# Altium PCB PCB.PcbDoc (part 2 of 2)
Units mil, origin at the board's own origin, x right, y up, seen from the top; angles counter-clockwise.
Board outline 3950.03 x 3160.03 mil, 2 copper layers (Top Layer, Bottom Layer); 198 components, 30 nets, 510 pads, 84 vias.
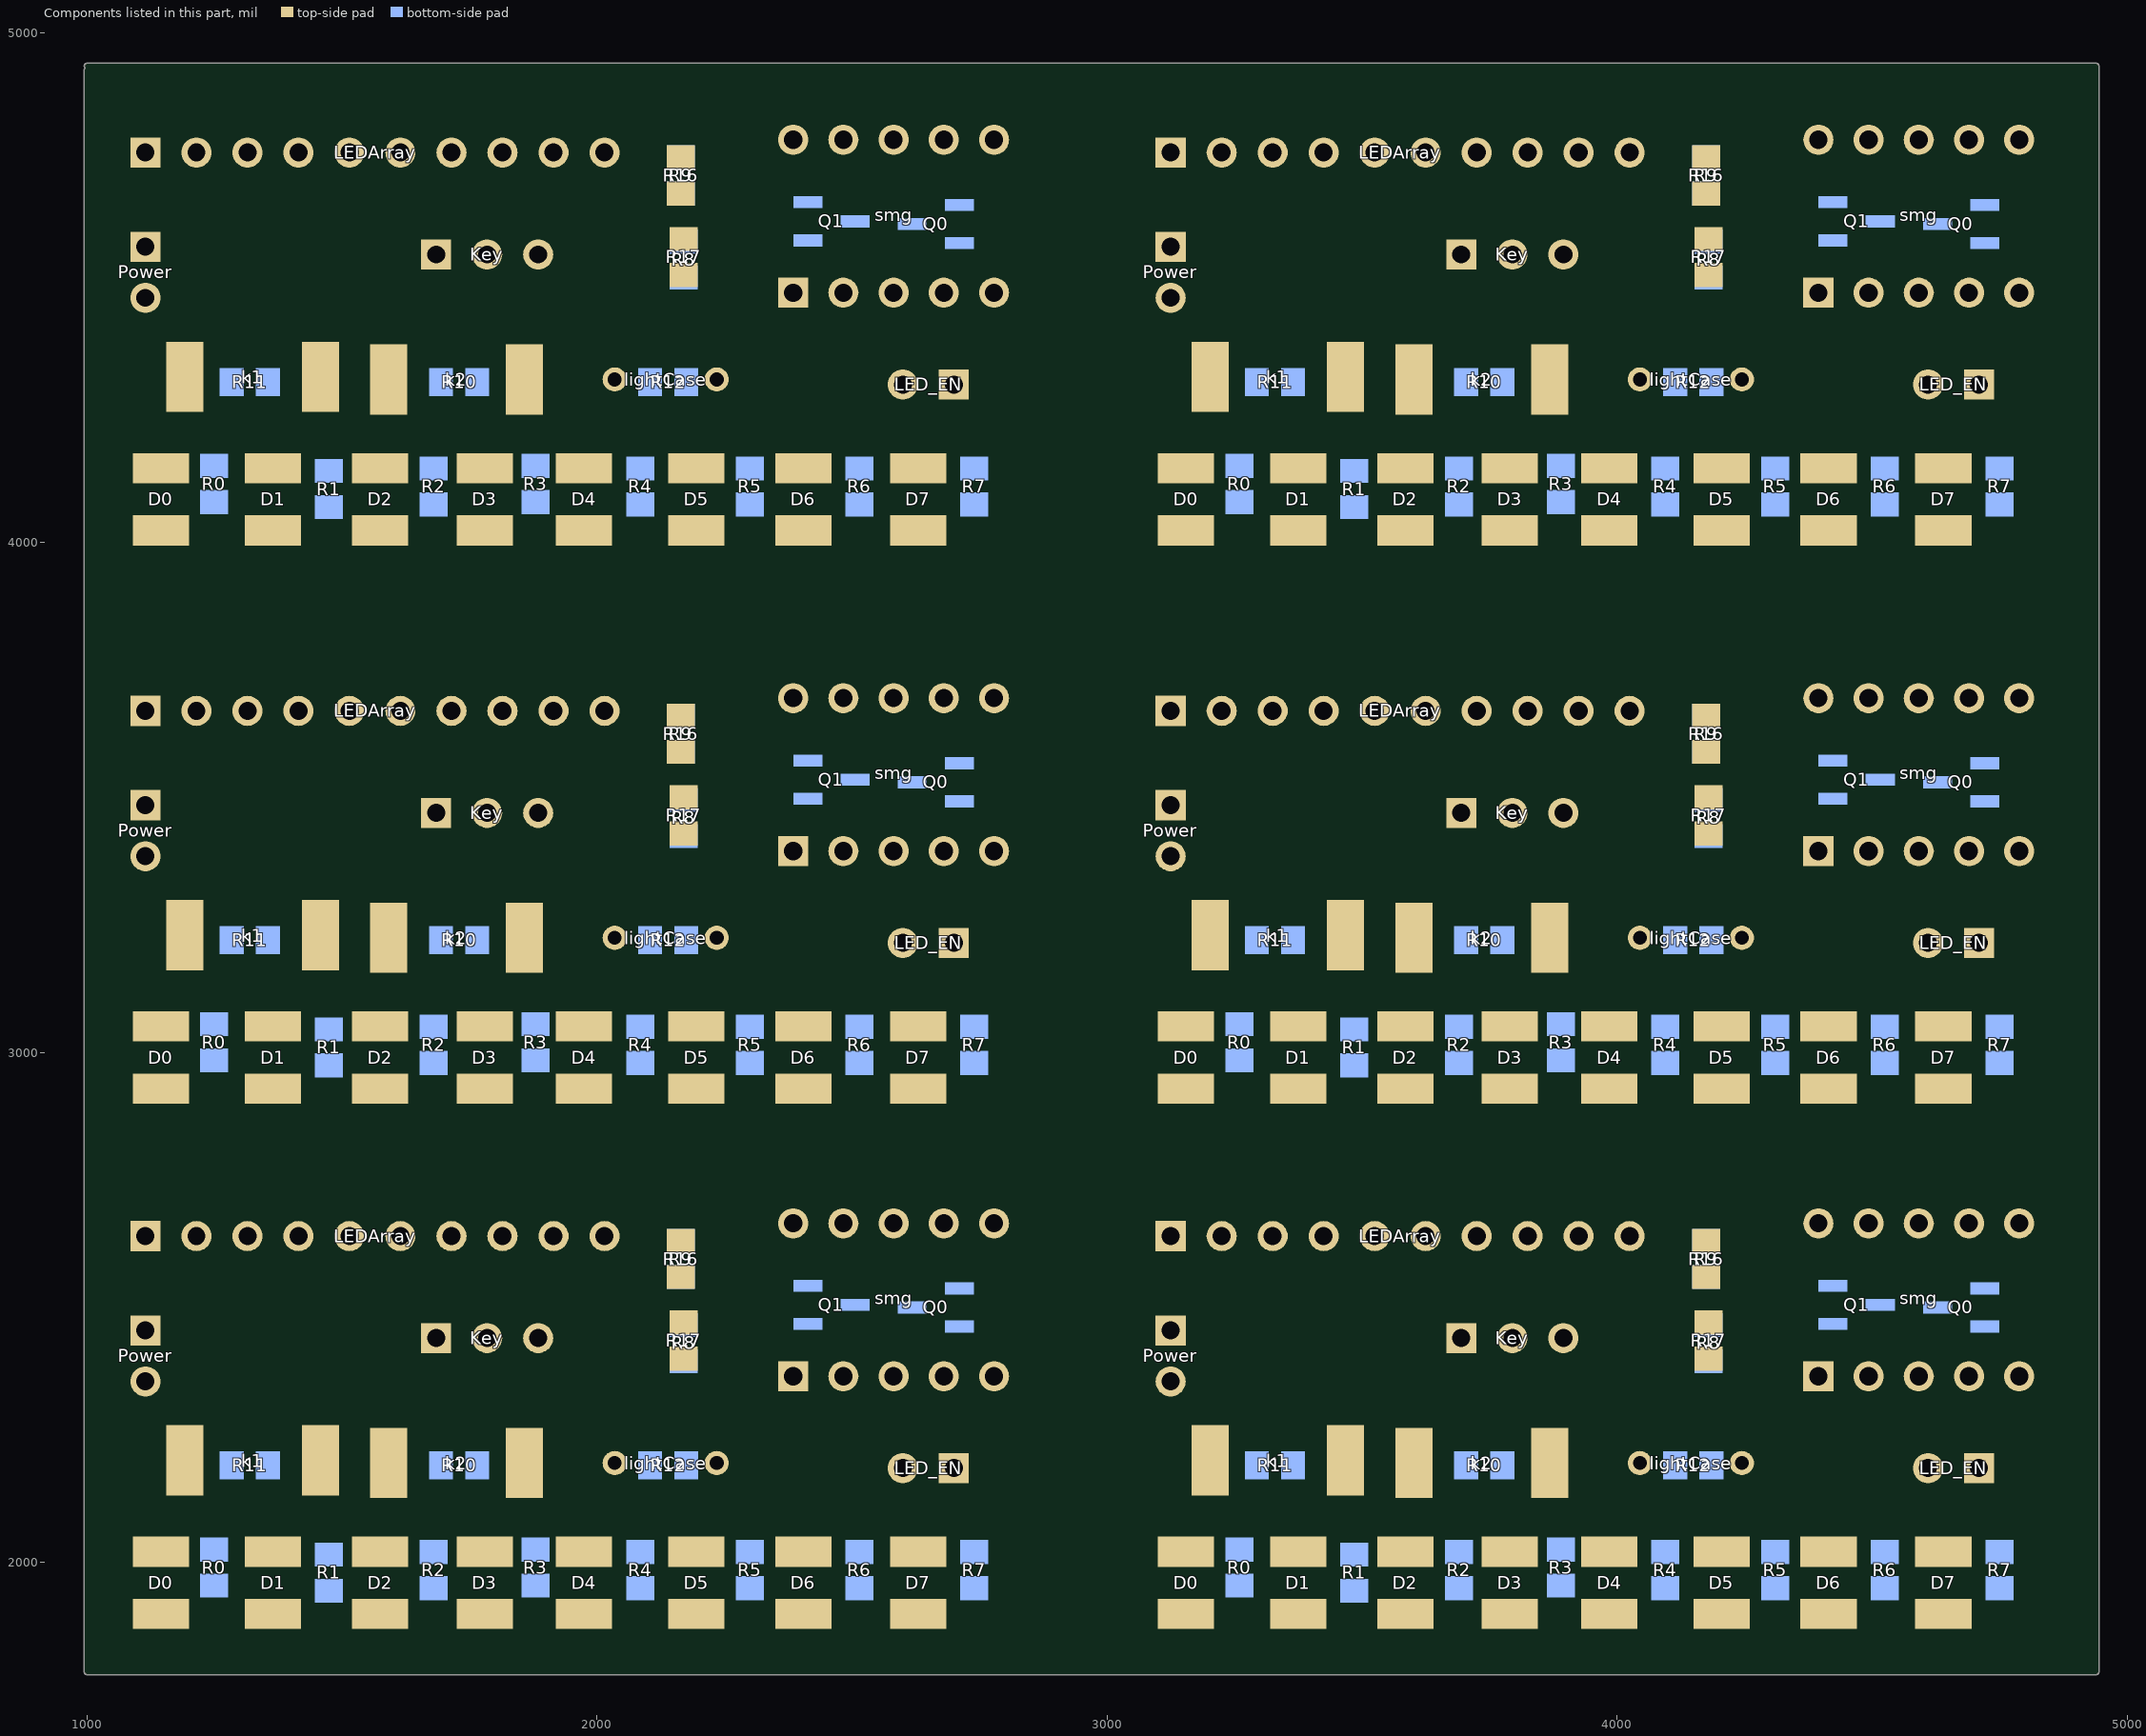
[diagram p2: the components of this part, seen from the top]

## Via types
v1: diameter 50, hole 28, Top Layer to Bottom Layer, 84 vias

## Nets (pads, with @x,y where several pads share a name; then routed paths per layer and width w, separated by ;. In a path a pad name is that pad's centre, name@x,y a point inside that pad or via, vN(x,y) a via of type N, cw(c..) or ccw(c..) an arc to the next point about the centre after c; other vN are vias at no path point) (continued)
copper on no net: | length 167112.4
  Top Layer w10: v1(1070,2242) 1070,2495 1215,2640 ; v1(1070,3272) 1070,3525 1215,3670 ; 1115,2355 1192.13,2277.87 1192.13,2200 1192.13,2125 1202.13,2115 1582.13,2115 1592.13,2125 1592.13,2195 ; 1115,3385 1192.13,3307.87 1192.13,3230 1192.13,3155 1202.13,3145 1582.13,3145 1592.13,3155 1592.13,3225 ; 1145,1898.98 1365,1898.98 1575,1898.98 1780,1898.98 1975,1898.98 2195,1898.98 2405,1898.98 2630,1898.98 2701,1969.98 2701,2066 2700,2067 2700,2185 ; 1145,2928.98 1365,2928.98 1575,2928.98 1780,2928.98 1975,2928.98 2195,2928.98 2405,2928.98 2630,2928.98 2701,2999.98 2701,3096 2700,3097 2700,3215 ; 1415,2640 1505,2730 2383,2730 2438,2675 2438,2410.43 2483.43,2365 ; 1415,3670 1505,3760 2383,3760 2438,3705 2438,3440.43 2483.43,3395 ; 1457.87,2200 1457.87,2275 1497.87,2315 1608,2315 1685,2392 1685,2440 ; 1457.87,3230 1457.87,3305 1497.87,3345 1608,3345 1685,3422 1685,3470 ; 1785,2440 1857.87,2367.13 1857.87,2195 ; 1785,3470 1857.87,3397.13 1857.87,3225 ; 1815,2640 1815,2582.09 2127.09,2270 2683.7,2270 2778.7,2365 ; 1815,3670 1815,3612.09 2127.09,3300 2683.7,3300 2778.7,3395 ; 1885,2440 2130,2195 2235,2195 ; 1885,3470 2130,3225 2235,3225 ; 1915,2640 1995,2560 2097.2,2560 2097.63,2559.57 2165,2559.57 ; 1915,3670 1995,3590 2097.2,3590 2097.63,3589.57 2165,3589.57 ; v1(2013,2520) 2032,2539 2044,2539 v1(2107,2476) ; v1(2013,3550) 2032,3569 2044,3569 v1(2107,3506) ; 2015,2640 2065,2690 2200,2690 2240,2650 2240,2470.43 2170,2470.43 ; 2015,3670 2065,3720 2200,3720 2240,3680 2240,3500.43 2170,3500.43 ; 2035,2195 2078,2152 2567,2152 2600,2185 ; 2035,3225 2078,3182 2567,3182 2600,3215 ; 2165,2630.43 2093.43,2630.43 2053.53,2590.53 1995.47,2590.53 1960,2626 1960,2664.53 1940,2684.53 1880,2684.53 1870,2674.53 1870,2592.75 2142.27,2320.47 2520,2320.47 2533,2333.47 2533,2475 2573,2515 v1(2779,2515) ; 2165,3660.43 2093.43,3660.43 2053.53,3620.53 1995.47,3620.53 1960,3656 1960,3694.53 1940,3714.53 1880,3714.53 1870,3704.53 1870,3622.75 2142.27,3350.47 2520,3350.47 2533,3363.47 2533,3505 2573,3545 v1(2779,3545) ; 2170,2399.57 2234.97,2399.57 2280,2444.6 v1(2280,2450) ; 2170,3429.57 2234.97,3429.57 2280,3474.6 v1(2280,3480) ; v1(2280,2091) 1826,2091 1730,2187 1730,2525 1615,2640 1665,2690 1835.94,2690 1855.94,2710 2340,2710 2385,2665 ; v1(2280,3121) 1826,3121 1730,3217 1730,3555 1615,3670 1665,3720 1835.94,3720 1855.94,3740 2340,3740 2385,3695 ; v1(3080,2242) 3080,2495 3225,2640 ; v1(3080,3272) 3080,3525 3225,3670 ; v1(3080,4367) 3080,4620 3225,4765 ; 3125,2355 3202.13,2277.87 3202.13,2200 3202.13,2125 3212.13,2115 3592.13,2115 3602.13,2125 3602.13,2195 ; 3125,3385 3202.13,3307.87 3202.13,3230 3202.13,3155 3212.13,3145 3592.13,3145 3602.13,3155 3602.13,3225 ; 3125,4480 3202.13,4402.87 3202.13,4325 3202.13,4250 3212.13,4240 3592.13,4240 3602.13,4250 3602.13,4320 ; 3155,1898.98 3375,1898.98 3585,1898.98 3790,1898.98 3985,1898.98 4205,1898.98 4415,1898.98 4640,1898.98 4711,1969.98 4711,2066 4710,2067 4710,2185 ; 3155,2928.98 3375,2928.98 3585,2928.98 3790,2928.98 3985,2928.98 4205,2928.98 4415,2928.98 4640,2928.98 4711,2999.98 4711,3096 4710,3097 4710,3215 ; 3155,4023.98 3375,4023.98 3585,4023.98 3790,4023.98 3985,4023.98 4205,4023.98 4415,4023.98 4640,4023.98 4711,4094.98 4711,4191 4710,4192 4710,4310 ; 3425,2640 3515,2730 4393,2730 4448,2675 4448,2410.43 4493.43,2365 ; 3425,3670 3515,3760 4393,3760 4448,3705 4448,3440.43 4493.43,3395 ; 3425,4765 3515,4855 4393,4855 4448,4800 4448,4535.43 4493.43,4490 ; 3467.87,2200 3467.87,2275 3507.87,2315 3618,2315 3695,2392 3695,2440 ; 3467.87,3230 3467.87,3305 3507.87,3345 3618,3345 3695,3422 3695,3470 ; 3467.87,4325 3467.87,4400 3507.87,4440 3618,4440 3695,4517 3695,4565 ; 3795,2440 3867.87,2367.13 3867.87,2195 ; 3795,3470 3867.87,3397.13 3867.87,3225 ; 3795,4565 3867.87,4492.13 3867.87,4320 ; 3825,2640 3825,2582.09 4137.09,2270 4693.7,2270 4788.7,2365 ; 3825,3670 3825,3612.09 4137.09,3300 4693.7,3300 4788.7,3395 ; 3825,4765 3825,4707.09 4137.09,4395 4693.7,4395 4788.7,4490 ; 3895,2440 4140,2195 4245,2195 ; 3895,3470 4140,3225 4245,3225 ; 3895,4565 4140,4320 4245,4320 ; 3925,2640 4005,2560 4107.2,2560 4107.63,2559.57 4175,2559.57 ; 3925,3670 4005,3590 4107.2,3590 4107.63,3589.57 4175,3589.57 ; 3925,4765 4005,4685 4107.2,4685 4107.63,4684.57 4175,4684.57 ; v1(4023,2520) 4042,2539 4054,2539 v1(4117,2476) ; v1(4023,3550) 4042,3569 4054,3569 v1(4117,3506) ; v1(4023,4645) 4042,4664 4054,4664 v1(4117,4601) ; 4025,2640 4075,2690 4210,2690 4250,2650 4250,2470.43 4180,2470.43 ; 4025,3670 4075,3720 4210,3720 4250,3680 4250,3500.43 4180,3500.43 ; 4025,4765 4075,4815 4210,4815 4250,4775 4250,4595.43 4180,4595.43 ; 4045,2195 4088,2152 4577,2152 4610,2185 ; 4045,3225 4088,3182 4577,3182 4610,3215 ; 4045,4320 4088,4277 4577,4277 4610,4310 ; 4175,2630.43 4103.43,2630.43 4063.53,2590.53 4005.47,2590.53 3970,2626 3970,2664.53 3950,2684.53 3890,2684.53 3880,2674.53 3880,2592.75 4152.27,2320.47 4530,2320.47 4543,2333.47 4543,2475 4583,2515 v1(4789,2515) ; 4175,3660.43 4103.43,3660.43 4063.53,3620.53 4005.47,3620.53 3970,3656 3970,3694.53 3950,3714.53 3890,3714.53 3880,3704.53 3880,3622.75 4152.27,3350.47 4530,3350.47 4543,3363.47 4543,3505 4583,3545 v1(4789,3545) ; 4175,4755.43 4103.43,4755.43 4063.53,4715.53 4005.47,4715.53 3970,4751 3970,4789.53 3950,4809.53 3890,4809.53 3880,4799.53 3880,4717.75 4152.27,4445.47 4530,4445.47 4543,4458.47 4543,4600 4583,4640 v1(4789,4640) ; 4180,2399.57 4244.97,2399.57 4290,2444.6 v1(4290,2450) ; 4180,3429.57 4244.97,3429.57 4290,3474.6 v1(4290,3480) ; 4180,4524.57 4244.97,4524.57 4290,4569.6 v1(4290,4575) ; v1(4290,2091) 3836,2091 3740,2187 3740,2525 3625,2640 3675,2690 3845.94,2690 3865.94,2710 4350,2710 4395,2665 ; v1(4290,3121) 3836,3121 3740,3217 3740,3555 3625,3670 3675,3720 3845.94,3720 3865.94,3740 4350,3740 4395,3695 ; v1(4290,4216) 3836,4216 3740,4312 3740,4650 3625,4765 3675,4815 3845.94,4815 3865.94,4835 4350,4835 4395,4790
  Bottom Layer w10: v1(1070,2242) 1070,2007 1162,1915 1283,1915 1293,1925 1293,2029.02 1325,2061.02 1394.98,2061.02 1440.57,2015.43 1475,2015.43 ; v1(1070,3272) 1070,3037 1162,2945 1283,2945 1293,2955 1293,3059.02 1325,3091.02 1394.98,3091.02 1440.57,3045.43 1475,3045.43 ; 1115,2355 1170,2300 1170,2188 1276.98,2081.02 2087.93,2081.02 2104.57,2097.67 2104.57,2190 ; 1115,2455 1284.13,2285.87 1284.13,2233 ; 1115,3385 1170,3330 1170,3218 1276.98,3111.02 2087.93,3111.02 2104.57,3127.67 2104.57,3220 ; 1115,3485 1284.13,3315.87 1284.13,3263 ; v1(1145,2021.02) 1211.46,1954.57 1250,1954.57 ; v1(1145,3051.02) 1211.46,2984.57 1250,2984.57 ; 1215,2640 1304.53,2729.53 2517.32,2729.53 2581.85,2665 ; 1215,3670 1304.53,3759.53 2517.32,3759.53 2581.85,3695 ; 1250,2025.43 1250,2062 1136,2176 1136,2262 1041,2357 1041,2566 1115,2640 1224.53,2749.53 2595.75,2749.53 2680.28,2665 ; 1250,3055.43 1250,3092 1136,3206 1136,3292 1041,3387 1041,3596 1115,3670 1224.53,3779.53 2595.75,3779.53 2680.28,3695 ; 1284.13,2190 1284.13,2233 ; 1284.13,3220 1284.13,3263 ; 1315,2640 1359.53,2684.53 1540,2684.53 1560,2664.53 1560,2626 1666,2520 1942,2520 1952.72,2509.28 1952.72,2413.57 2065.21,2301.09 2258.12,2301.09 2330,2372.97 2330,2400 2339.53,2409.53 2537.32,2409.53 2581.85,2365 2581.85,2315.92 2354,2088.07 2354,1915 2309,1870 1870.43,1870 1720,2020.43 1680,2020.43 ; 1315,3670 1359.53,3714.53 1540,3714.53 1560,3694.53 1560,3656 1666,3550 1942,3550 1952.72,3539.28 1952.72,3443.57 2065.21,3331.09 2258.12,3331.09 2330,3402.97 2330,3430 2339.53,3439.53 2537.32,3439.53 2581.85,3395 2581.85,3345.92 2354,3118.07 2354,2945 2309,2900 1870.43,2900 1720,3050.43 1680,3050.43 ; 1355,2190 1355,2162 1340,2147 1245,2147 1245,2295 1140,2400 1080,2400 1070,2410 1070,2515 1100,2545 1580,2545 1685,2440 ; 1355,3220 1355,3192 1340,3177 1245,3177 1245,3325 1140,3430 1080,3430 1070,3440 1070,3545 1100,3575 1580,3575 1685,3470 ; v1(1365,2021.02) 1441.46,1944.57 1475,1944.57 ; v1(1365,3051.02) 1441.46,2974.57 1475,2974.57 ; 1515,2640 1656,2499 1920,2499 1932.72,2486.28 1932.72,2403.98 2055.61,2281.09 2301.09,2281.09 2385,2365 2385,2267.24 2273.76,2156 2216.5,2156 2114.5,2054 2085,2054 2085,2020.43 ; 1515,3670 1656,3529 1920,3529 1932.72,3516.28 1932.72,3433.98 2055.61,3311.09 2301.09,3311.09 2385,3395 2385,3297.24 2273.76,3186 2216.5,3186 2114.5,3084 2085,3084 2085,3050.43 ; v1(1575,2021.02) 1646.46,1949.57 1680,1949.57 ; v1(1575,3051.02) 1646.46,2979.57 1680,2979.57 ; 1715,2640 1811.88,2543.12 1959.88,2543.12 1972.72,2530.28 1972.72,2437.19 2087.15,2322.77 2240.54,2322.77 2310,2392.22 2310,2419.06 2320.47,2429.53 2444.53,2429.53 2460,2445 2460,2522 2470,2532 2650,2532 2665,2517 2665,2440.28 2680.28,2425 2680.28,2365 2655,2339.72 2655,2175 2530,2050 2515,2020.43 ; 1715,3670 1811.88,3573.12 1959.88,3573.12 1972.72,3560.28 1972.72,3467.19 2087.15,3352.77 2240.54,3352.77 2310,3422.22 2310,3449.06 2320.47,3459.53 2444.53,3459.53 2460,3475 2460,3552 2470,3562 2650,3562 2665,3547 2665,3470.28 2680.28,3455 2680.28,3395 2655,3369.72 2655,3205 2530,3080 2515,3050.43 ; 1765.43,2190 1765.43,2305 1785,2324.57 1785,2440 ; 1765.43,3220 1765.43,3335 1785,3354.57 1785,3470 ; v1(1780,2021.02) 1846.46,1954.57 1880,1954.57 ; v1(1780,3051.02) 1846.46,2984.57 1880,2984.57 ; 1880,2025.43 1908.57,2025.43 2024,1910 2130,1910 2155,1935 2155,2046 2240,2131 2356,2131 2483.43,2258.43 2483.43,2365 ; 1880,3055.43 1908.57,3055.43 2024,2940 2130,2940 2155,2965 2155,3076 2240,3161 2356,3161 2483.43,3288.43 2483.43,3395 ; v1(1975,2021.02) 2046.46,1949.57 2085,1949.57 ; v1(1975,3051.02) 2046.46,2979.57 2085,2979.57 ; v1(2013,2520) 1970,2563 1970,2675 2004.53,2709.53 2470,2709.53 2483.43,2696.1 2483.43,2665 ; v1(2013,3550) 1970,3593 1970,3705 2004.53,3739.53 2470,3739.53 2483.43,3726.1 2483.43,3695 ; 2035,2195 1949,2109 1740.57,2109 1694.57,2155 1694.57,2190 1437,2190 1394,2233 1284.13,2233 ; 2035,3225 1949,3139 1740.57,3139 1694.57,3185 1694.57,3220 1437,3220 1394,3263 1284.13,3263 ; v1(2107,2476) 2170,2476 2170,2465.43 ; v1(2107,3506) 2170,3506 2170,3495.43 ; 2165,2559.57 2320.55,2559.57 2360.2,2599.21 2712.91,2599.21 2778.7,2665 ; 2165,2630.43 2137.43,2630.43 2054.44,2547.44 2054.44,2396.56 2100.44,2350.56 2208.12,2350.56 2232.56,2375 2232.56,2481.56 2258,2507 2344.6,2507 2380,2542.4 2413.74,2542.4 ; 2165,3589.57 2320.55,3589.57 2360.2,3629.21 2712.91,3629.21 2778.7,3695 ; 2165,3660.43 2137.43,3660.43 2054.44,3577.44 2054.44,3426.56 2100.44,3380.56 2208.12,3380.56 2232.56,3405 2232.56,3511.56 2258,3537 2344.6,3537 2380,3572.4 2413.74,3572.4 ; 2170,2394.57 2202.13,2394.57 2212.56,2405 2212.56,2500.16 2240,2527.6 2319.6,2527.6 2362,2570 2784,2570 2819,2535 2819,2475 2806.6,2462.6 2711.26,2462.6 ; 2170,3424.57 2202.13,3424.57 2212.56,3435 2212.56,3530.16 2240,3557.6 2319.6,3557.6 2362,3600 2784,3600 2819,3565 2819,3505 2806.6,3492.6 2711.26,3492.6 ; 2175.43,2190 2202,2190 2207,2195 2235,2195 ; 2175.43,3220 2202,3220 2207,3225 2235,3225 ; v1(2195,2021.02) 2266.46,1949.57 2300,1949.57 ; v1(2195,3051.02) 2266.46,2979.57 2300,2979.57 ; v1(2280,2091) 2300,2071 2300,2020.43 ; v1(2280,2450) 2285.4,2450 2303,2467.6 2413.74,2467.6 ; v1(2280,3121) 2300,3101 2300,3050.43 ; v1(2280,3480) 2285.4,3480 2303,3497.6 2413.74,3497.6 ; v1(2405,2021.02) 2476.46,1949.57 2515,1949.57 ; v1(2405,3051.02) 2476.46,2979.57 2515,2979.57 ; 2506.26,2505 2555.2,2505 2560.2,2500 2618.74,2500 2631,2487.74 2631,2290 2600,2259 2600,2185 ; 2506.26,3535 2555.2,3535 2560.2,3530 2618.74,3530 2631,3517.74 2631,3320 2600,3289 2600,3215 ; v1(2630,2021.02) 2701.46,1949.57 2740,1949.57 ; v1(2630,3051.02) 2701.46,2979.57 2740,2979.57 ; 2711.26,2537.4 2756.6,2537.4 v1(2779,2515) ; 2711.26,3567.4 2756.6,3567.4 v1(2779,3545) ; 2740,2020.43 2740,2086 2778.7,2124.7 2778.7,2365 ; 2740,3050.43 2740,3116 2778.7,3154.7 2778.7,3395 ; v1(3080,2242) 3080,2007 3172,1915 3293,1915 3303,1925 3303,2029.02 3335,2061.02 3404.98,2061.02 3450.57,2015.43 3485,2015.43 ; v1(3080,3272) 3080,3037 3172,2945 3293,2945 3303,2955 3303,3059.02 3335,3091.02 3404.98,3091.02 3450.57,3045.43 3485,3045.43 ; v1(3080,4367) 3080,4132 3172,4040 3293,4040 3303,4050 3303,4154.02 3335,4186.02 3404.98,4186.02 3450.57,4140.43 3485,4140.43 ; 3125,2355 3180,2300 3180,2188 3286.98,2081.02 4097.93,2081.02 4114.57,2097.67 4114.57,2190 ; 3125,2455 3294.13,2285.87 3294.13,2233 ; 3125,3385 3180,3330 3180,3218 3286.98,3111.02 4097.93,3111.02 4114.57,3127.67 4114.57,3220 ; 3125,3485 3294.13,3315.87 3294.13,3263 ; 3125,4480 3180,4425 3180,4313 3286.98,4206.02 4097.93,4206.02 4114.57,4222.67 4114.57,4315 ; 3125,4580 3294.13,4410.87 3294.13,4358 ; v1(3155,2021.02) 3221.46,1954.57 3260,1954.57 ; v1(3155,3051.02) 3221.46,2984.57 3260,2984.57 ; v1(3155,4146.02) 3221.46,4079.57 3260,4079.57 ; 3225,2640 3314.53,2729.53 4527.32,2729.53 4591.85,2665 ; 3225,3670 3314.53,3759.53 4527.32,3759.53 4591.85,3695 ; 3225,4765 3314.53,4854.53 4527.32,4854.53 4591.85,4790 ; 3260,2025.43 3260,2062 3146,2176 3146,2262 3051,2357 3051,2566 3125,2640 3234.53,2749.53 4605.75,2749.53 4690.28,2665 ; 3260,3055.43 3260,3092 3146,3206 3146,3292 3051,3387 3051,3596 3125,3670 3234.53,3779.53 4605.75,3779.53 4690.28,3695 ; 3260,4150.43 3260,4187 3146,4301 3146,4387 3051,4482 3051,4691 3125,4765 3234.53,4874.53 4605.75,4874.53 4690.28,4790 ; 3294.13,2190 3294.13,2233 ; 3294.13,3220 3294.13,3263 ; 3294.13,4315 3294.13,4358 ; 3325,2640 3369.53,2684.53 3550,2684.53 3570,2664.53 3570,2626 3676,2520 3952,2520 3962.72,2509.28 3962.72,2413.57 4075.21,2301.09 4268.12,2301.09 4340,2372.97 4340,2400 4349.53,2409.53 4547.32,2409.53 4591.85,2365 4591.85,2315.92 4364,2088.07 4364,1915 4319,1870 3880.43,1870 3730,2020.43 3690,2020.43 ; 3325,3670 3369.53,3714.53 3550,3714.53 3570,3694.53 3570,3656 3676,3550 3952,3550 3962.72,3539.28 3962.72,3443.57 4075.21,3331.09 4268.12,3331.09 4340,3402.97 4340,3430 4349.53,3439.53 4547.32,3439.53 4591.85,3395 4591.85,3345.92 4364,3118.07 4364,2945 4319,2900 3880.43,2900 3730,3050.43 3690,3050.43 ; 3325,4765 3369.53,4809.53 3550,4809.53 3570,4789.53 3570,4751 3676,4645 3952,4645 3962.72,4634.28 3962.72,4538.57 4075.21,4426.09 4268.12,4426.09 4340,4497.97 4340,4525 4349.53,4534.53 4547.32,4534.53 4591.85,4490 4591.85,4440.92 4364,4213.07 4364,4040 4319,3995 3880.43,3995 3730,4145.43 3690,4145.43 ; 3365,2190 3365,2162 3350,2147 3255,2147 3255,2295 3150,2400 3090,2400 3080,2410 3080,2515 3110,2545 3590,2545 3695,2440 ; 3365,3220 3365,3192 3350,3177 3255,3177 3255,3325 3150,3430 3090,3430 3080,3440 3080,3545 3110,3575 3590,3575 3695,3470 ; 3365,4315 3365,4287 3350,4272 3255,4272 3255,4420 3150,4525 3090,4525 3080,4535 3080,4640 3110,4670 3590,4670 3695,4565 ; v1(3375,2021.02) 3451.46,1944.57 3485,1944.57 ; v1(3375,3051.02) 3451.46,2974.57 3485,2974.57 ; v1(3375,4146.02) 3451.46,4069.57 3485,4069.57 ; 3525,2640 3666,2499 3930,2499 3942.72,2486.28 3942.72,2403.98 4065.61,2281.09 4311.09,2281.09 4395,2365 4395,2267.24 4283.76,2156 4226.5,2156 4124.5,2054 4095,2054 4095,2020.43 ; 3525,3670 3666,3529 3930,3529 3942.72,3516.28 3942.72,3433.98 4065.61,3311.09 4311.09,3311.09 4395,3395 4395,3297.24 4283.76,3186 4226.5,3186 4124.5,3084 4095,3084 4095,3050.43 ; 3525,4765 3666,4624 3930,4624 3942.72,4611.28 3942.72,4528.98 4065.61,4406.09 4311.09,4406.09 4395,4490 4395,4392.24 4283.76,4281 4226.5,4281 4124.5,4179 4095,4179 4095,4145.43 ; v1(3585,2021.02) 3656.46,1949.57 3690,1949.57 ; v1(3585,3051.02) 3656.46,2979.57 3690,2979.57 ; v1(3585,4146.02) 3656.46,4074.57 3690,4074.57 ; 3725,2640 3821.88,2543.12 3969.88,2543.12 3982.72,2530.28 3982.72,2437.19 4097.15,2322.77 4250.54,2322.77 4320,2392.22 4320,2419.06 4330.47,2429.53 4454.53,2429.53 4470,2445 4470,2522 4480,2532 4660,2532 4675,2517 4675,2440.28 4690.28,2425 4690.28,2365 4665,2339.72 4665,2175 4540,2050 4525,2020.43 ; 3725,3670 3821.88,3573.12 3969.88,3573.12 3982.72,3560.28 3982.72,3467.19 4097.15,3352.77 4250.54,3352.77 4320,3422.22 4320,3449.06 4330.47,3459.53 4454.53,3459.53 4470,3475 4470,3552 4480,3562 4660,3562 4675,3547 4675,3470.28 4690.28,3455 4690.28,3395 4665,3369.72 4665,3205 4540,3080 4525,3050.43 ; 3725,4765 3821.88,4668.12 3969.88,4668.12 3982.72,4655.28 3982.72,4562.19 4097.15,4447.77 4250.54,4447.77 4320,4517.22 4320,4544.06 4330.47,4554.53 4454.53,4554.53 4470,4570 4470,4647 4480,4657 4660,4657 4675,4642 4675,4565.28 4690.28,4550 4690.28,4490 4665,4464.72 4665,4300 4540,4175 4525,4145.43 ; 3775.43,2190 3775.43,2305 3795,2324.57 3795,2440 ; 3775.43,3220 3775.43,3335 3795,3354.57 3795,3470 ; 3775.43,4315 3775.43,4430 3795,4449.57 3795,4565 ; v1(3790,2021.02) 3856.46,1954.57 3890,1954.57 ; v1(3790,3051.02) 3856.46,2984.57 3890,2984.57 ; v1(3790,4146.02) 3856.46,4079.57 3890,4079.57 ; 3890,2025.43 3918.57,2025.43 4034,1910 4140,1910 4165,1935 4165,2046 4250,2131 4366,2131 4493.43,2258.43 4493.43,2365 ; 3890,3055.43 3918.57,3055.43 4034,2940 4140,2940 4165,2965 4165,3076 4250,3161 4366,3161 4493.43,3288.43 4493.43,3395 ; 3890,4150.43 3918.57,4150.43 4034,4035 4140,4035 4165,4060 4165,4171 4250,4256 4366,4256 4493.43,4383.43 4493.43,4490 ; v1(3985,2021.02) 4056.46,1949.57 4095,1949.57 ; v1(3985,3051.02) 4056.46,2979.57 4095,2979.57 ; v1(3985,4146.02) 4056.46,4074.57 4095,4074.57 ; v1(4023,2520) 3980,2563 3980,2675 4014.53,2709.53 4480,2709.53 4493.43,2696.1 4493.43,2665 ; v1(4023,3550) 3980,3593 3980,3705 4014.53,3739.53 4480,3739.53 4493.43,3726.1 4493.43,3695 ; v1(4023,4645) 3980,4688 3980,4800 4014.53,4834.53 4480,4834.53 4493.43,4821.1 4493.43,4790 ; 4045,2195 3959,2109 3750.57,2109 3704.57,2155 3704.57,2190 3447,2190 3404,2233 3294.13,2233 ; 4045,3225 3959,3139 3750.57,3139 3704.57,3185 3704.57,3220 3447,3220 3404,3263 3294.13,3263 ; 4045,4320 3959,4234 3750.57,4234 3704.57,4280 3704.57,4315 3447,4315 3404,4358 3294.13,4358 ; v1(4117,2476) 4180,2476 4180,2465.43 ; v1(4117,3506) 4180,3506 4180,3495.43 ; v1(4117,4601) 4180,4601 4180,4590.43 ; 4175,2559.57 4330.55,2559.57 4370.2,2599.21 4722.91,2599.21 4788.7,2665 ; 4175,2630.43 4147.43,2630.43 4064.44,2547.44 4064.44,2396.56 4110.44,2350.56 4218.12,2350.56 4242.56,2375 4242.56,2481.56 4268,2507 4354.6,2507 4390,2542.4 4423.74,2542.4 ; 4175,3589.57 4330.55,3589.57 4370.2,3629.21 4722.91,3629.21 4788.7,3695 ; 4175,3660.43 4147.43,3660.43 4064.44,3577.44 4064.44,3426.56 4110.44,3380.56 4218.12,3380.56 4242.56,3405 4242.56,3511.56 4268,3537 4354.6,3537 4390,3572.4 4423.74,3572.4 ; 4175,4684.57 4330.55,4684.57 4370.2,4724.21 4722.91,4724.21 4788.7,4790 ; 4175,4755.43 4147.43,4755.43 4064.44,4672.44 4064.44,4521.56 4110.44,4475.56 4218.12,4475.56 4242.56,4500 4242.56,4606.56 4268,4632 4354.6,4632 4390,4667.4 4423.74,4667.4 ; 4180,2394.57 4212.13,2394.57 4222.56,2405 4222.56,2500.16 4250,2527.6 4329.6,2527.6 4372,2570 4794,2570 4829,2535 4829,2475 4816.6,2462.6 4721.26,2462.6 ; 4180,3424.57 4212.13,3424.57 4222.56,3435 4222.56,3530.16 4250,3557.6 4329.6,3557.6 4372,3600 4794,3600 4829,3565 4829,3505 4816.6,3492.6 4721.26,3492.6 ; 4180,4519.57 4212.13,4519.57 4222.56,4530 4222.56,4625.16 4250,4652.6 4329.6,4652.6 4372,4695 4794,4695 4829,4660 4829,4600 4816.6,4587.6 4721.26,4587.6 ; 4185.43,2190 4212,2190 4217,2195 4245,2195 ; 4185.43,3220 4212,3220 4217,3225 4245,3225 ; 4185.43,4315 4212,4315 4217,4320 4245,4320 ; v1(4205,2021.02) 4276.46,1949.57 4310,1949.57 ; v1(4205,3051.02) 4276.46,2979.57 4310,2979.57 ; v1(4205,4146.02) 4276.46,4074.57 4310,4074.57 ; v1(4290,2091) 4310,2071 4310,2020.43 ; v1(4290,2450) 4295.4,2450 4313,2467.6 4423.74,2467.6 ; v1(4290,3121) 4310,3101 4310,3050.43 ; v1(4290,3480) 4295.4,3480 4313,3497.6 4423.74,3497.6 ; v1(4290,4216) 4310,4196 4310,4145.43 ; v1(4290,4575) 4295.4,4575 4313,4592.6 4423.74,4592.6 ; v1(4415,2021.02) 4486.46,1949.57 4525,1949.57 ; v1(4415,3051.02) 4486.46,2979.57 4525,2979.57 ; v1(4415,4146.02) 4486.46,4074.57 4525,4074.57 ; 4516.26,2505 4565.2,2505 4570.2,2500 4628.74,2500 4641,2487.74 4641,2290 4610,2259 4610,2185 ; 4516.26,3535 4565.2,3535 4570.2,3530 4628.74,3530 4641,3517.74 4641,3320 4610,3289 4610,3215 ; 4516.26,4630 4565.2,4630 4570.2,4625 4628.74,4625 4641,4612.74 4641,4415 4610,4384 4610,4310 ; v1(4640,2021.02) 4711.46,1949.57 4750,1949.57 ; v1(4640,3051.02) 4711.46,2979.57 4750,2979.57 ; v1(4640,4146.02) 4711.46,4074.57 4750,4074.57 ; 4721.26,2537.4 4766.6,2537.4 v1(4789,2515) ; 4721.26,3567.4 4766.6,3567.4 v1(4789,3545) ; 4721.26,4662.4 4766.6,4662.4 v1(4789,4640) ; 4750,2020.43 4750,2086 4788.7,2124.7 4788.7,2365 ; 4750,3050.43 4750,3116 4788.7,3154.7 4788.7,3395 ; 4750,4145.43 4750,4211 4788.7,4249.7 4788.7,4490

## Keep-outs
Keep-Out Layer:
  lines w10: 1000,4927.01 1000,1785 4930,1785 4940,1785 4940,4935 1000,4935 ; 1005,1790 2925,1790 2925,2755 ; 1005,2820 2925,2820 2925,3785 ; 1005,3915 2925,3915 2925,4880 ; 1005,4935 3270,4935 ; 3015,1790 4935,1790 4935,2755 ; 3015,2820 4935,2820 4935,3785 ; 3015,3915 4935,3915 4935,4880

## Other copper
Top Layer:
  text "机器人足球" at 1255,4515 h80
  text "机器人足球" at 3265,4515 h80
  text "机器人足球" at 1255,3420 h80
  text "机器人足球" at 3265,3420 h80
  text "机器人足球" at 1255,2390 h80
  text "机器人足球" at 3265,2390 h80

## Silkscreen, mask and mechanical layers (free items; w line width, h text height)
Top Overlay:
  lines w10: 1005,1790 1005,2755 2925,2755 2925,1790 1005,1790 ; 1005,2820 1005,3785 2925,3785 2925,2820 1005,2820 ; 1005,3915 2925,3915 2925,4880 1005,4880 1005,3915 ; 3015,1790 4935,1790 4935,2755 3015,2755 3015,1790 ; 3015,2820 4935,2820 4935,3785 3015,3785 3015,2820 ; 3015,3915 3015,4880 4935,4880 4935,3915 3015,3915
  text "A" at 1095,4825 h30
  text "B" at 1195,4825 h30
  text "C" at 1295,4825 h30
  text "D" at 1395,4825 h30
  text "E" at 1495,4825 h30
  text "F" at 1595,4825 h30
  text "G" at 1695,4825 h30
  text "DP" at 1795,4825 h30
  text "S1" at 1895,4825 h30
  text "S2" at 1995,4825 h30
  text "A" at 3105,4825 h30
  text "B" at 3205,4825 h30
  text "C" at 3305,4825 h30
  text "D" at 3405,4825 h30
  text "E" at 3505,4825 h30
  text "F" at 3605,4825 h30
  text "G" at 3705,4825 h30
  text "DP" at 3805,4825 h30
  text "S1" at 3905,4825 h30
  text "S2" at 4005,4825 h30
  text "D0" at 1085,4660 h30
  text "D1" at 1186.43,4660 h30
  text "D2" at 1287.86,4660 h30
  text "D3" at 1389.29,4660 h30
  text "D4" at 1490.71,4660 h30
  text "D5" at 1592.14,4660 h30
  text "D6" at 1693.57,4660 h30
  text "D7" at 1795,4660 h30
  text "D0" at 3095,4660 h30
  text "D1" at 3196.43,4660 h30
  text "D2" at 3297.86,4660 h30
  text "D3" at 3399.29,4660 h30
  text "D4" at 3500.71,4660 h30
  text "D5" at 3602.14,4660 h30
  text "D6" at 3703.57,4660 h30
  text "D7" at 3805,4660 h30
  text "VCC" at 1190,4605 h30
  text "VCC" at 3200,4605 h30
  text "L" at 1880,4465 h30
  text "L" at 3890,4465 h30
  text "K1" at 1670,4460 h30
  text "K2" at 1755,4460 h30
  text "K1" at 3680,4460 h30
  text "K2" at 3765,4460 h30
  text "GND" at 1195,4425 h30
  text "GND" at 3205,4425 h30
  text "A" at 1095,3730 h30
  text "B" at 1195,3730 h30
  text "C" at 1295,3730 h30
  text "D" at 1395,3730 h30
  text "E" at 1495,3730 h30
  text "F" at 1595,3730 h30
  text "G" at 1695,3730 h30
  text "DP" at 1795,3730 h30
  text "S1" at 1895,3730 h30
  text "S2" at 1995,3730 h30
  text "A" at 3105,3730 h30
  text "B" at 3205,3730 h30
  text "C" at 3305,3730 h30
  text "D" at 3405,3730 h30
  text "E" at 3505,3730 h30
  text "F" at 3605,3730 h30
  text "G" at 3705,3730 h30
  text "DP" at 3805,3730 h30
  text "S1" at 3905,3730 h30
  text "S2" at 4005,3730 h30
  text "D0" at 1085,3565 h30
  text "D1" at 1186.43,3565 h30
  text "D2" at 1287.86,3565 h30
  text "D3" at 1389.29,3565 h30
  text "D4" at 1490.71,3565 h30
  text "D5" at 1592.14,3565 h30
  text "D6" at 1693.57,3565 h30
  text "D7" at 1795,3565 h30
  text "D0" at 3095,3565 h30
  text "D1" at 3196.43,3565 h30
  text "D2" at 3297.86,3565 h30
  text "D3" at 3399.29,3565 h30
  text "D4" at 3500.71,3565 h30
  text "D5" at 3602.14,3565 h30
  text "D6" at 3703.57,3565 h30
  text "D7" at 3805,3565 h30
  text "VCC" at 1190,3510 h30
  text "VCC" at 3200,3510 h30
  text "L" at 1880,3370 h30
  text "L" at 3890,3370 h30
  text "K1" at 1670,3365 h30
  text "K2" at 1755,3365 h30
  text "K1" at 3680,3365 h30
  text "K2" at 3765,3365 h30
  text "GND" at 1195,3330 h30
  text "GND" at 3205,3330 h30
  text "A" at 1095,2700 h30
  text "B" at 1195,2700 h30
  text "C" at 1295,2700 h30
  text "D" at 1395,2700 h30
  text "E" at 1495,2700 h30
  text "F" at 1595,2700 h30
  text "G" at 1695,2700 h30
  text "DP" at 1795,2700 h30
  text "S1" at 1895,2700 h30
  text "S2" at 1995,2700 h30
  text "A" at 3105,2700 h30
  text "B" at 3205,2700 h30
  text "C" at 3305,2700 h30
  text "D" at 3405,2700 h30
  text "E" at 3505,2700 h30
  text "F" at 3605,2700 h30
  text "G" at 3705,2700 h30
  text "DP" at 3805,2700 h30
  text "S1" at 3905,2700 h30
  text "S2" at 4005,2700 h30
  text "D0" at 1085,2535 h30
  text "D1" at 1186.43,2535 h30
  text "D2" at 1287.86,2535 h30
  text "D3" at 1389.29,2535 h30
  text "D4" at 1490.71,2535 h30
  text "D5" at 1592.14,2535 h30
  text "D6" at 1693.57,2535 h30
  text "D7" at 1795,2535 h30
  text "D0" at 3095,2535 h30
  text "D1" at 3196.43,2535 h30
  text "D2" at 3297.86,2535 h30
  text "D3" at 3399.29,2535 h30
  text "D4" at 3500.71,2535 h30
  text "D5" at 3602.14,2535 h30
  text "D6" at 3703.57,2535 h30
  text "D7" at 3805,2535 h30
  text "VCC" at 1190,2480 h30
  text "VCC" at 3200,2480 h30
  text "L" at 1880,2340 h30
  text "L" at 3890,2340 h30
  text "K1" at 1670,2335 h30
  text "K2" at 1755,2335 h30
  text "K1" at 3680,2335 h30
  text "K2" at 3765,2335 h30
  text "GND" at 1195,2300 h30
  text "GND" at 3205,2300 h30
Top Solder:
  rectangle: 1255,2355 1620,2475
  rectangle: 3265,2355 3630,2475
  rectangle: 1255,3385 1620,3505
  rectangle: 3265,3385 3630,3505
  rectangle: 3265,4480 3630,4600
  rectangle: 1255,4480 1620,4600